# Altium PCB main.PcbDoc
Units mm, origin at the board's own origin, x right, y up, seen from the top; angles counter-clockwise.
Board outline 50.5 x 38.5 mm, 2 copper layers (Top Layer, Bottom Layer); 16 components, 10 nets, 53 pads, 14 vias.
Unrouted connection lines stored in the file: 1.
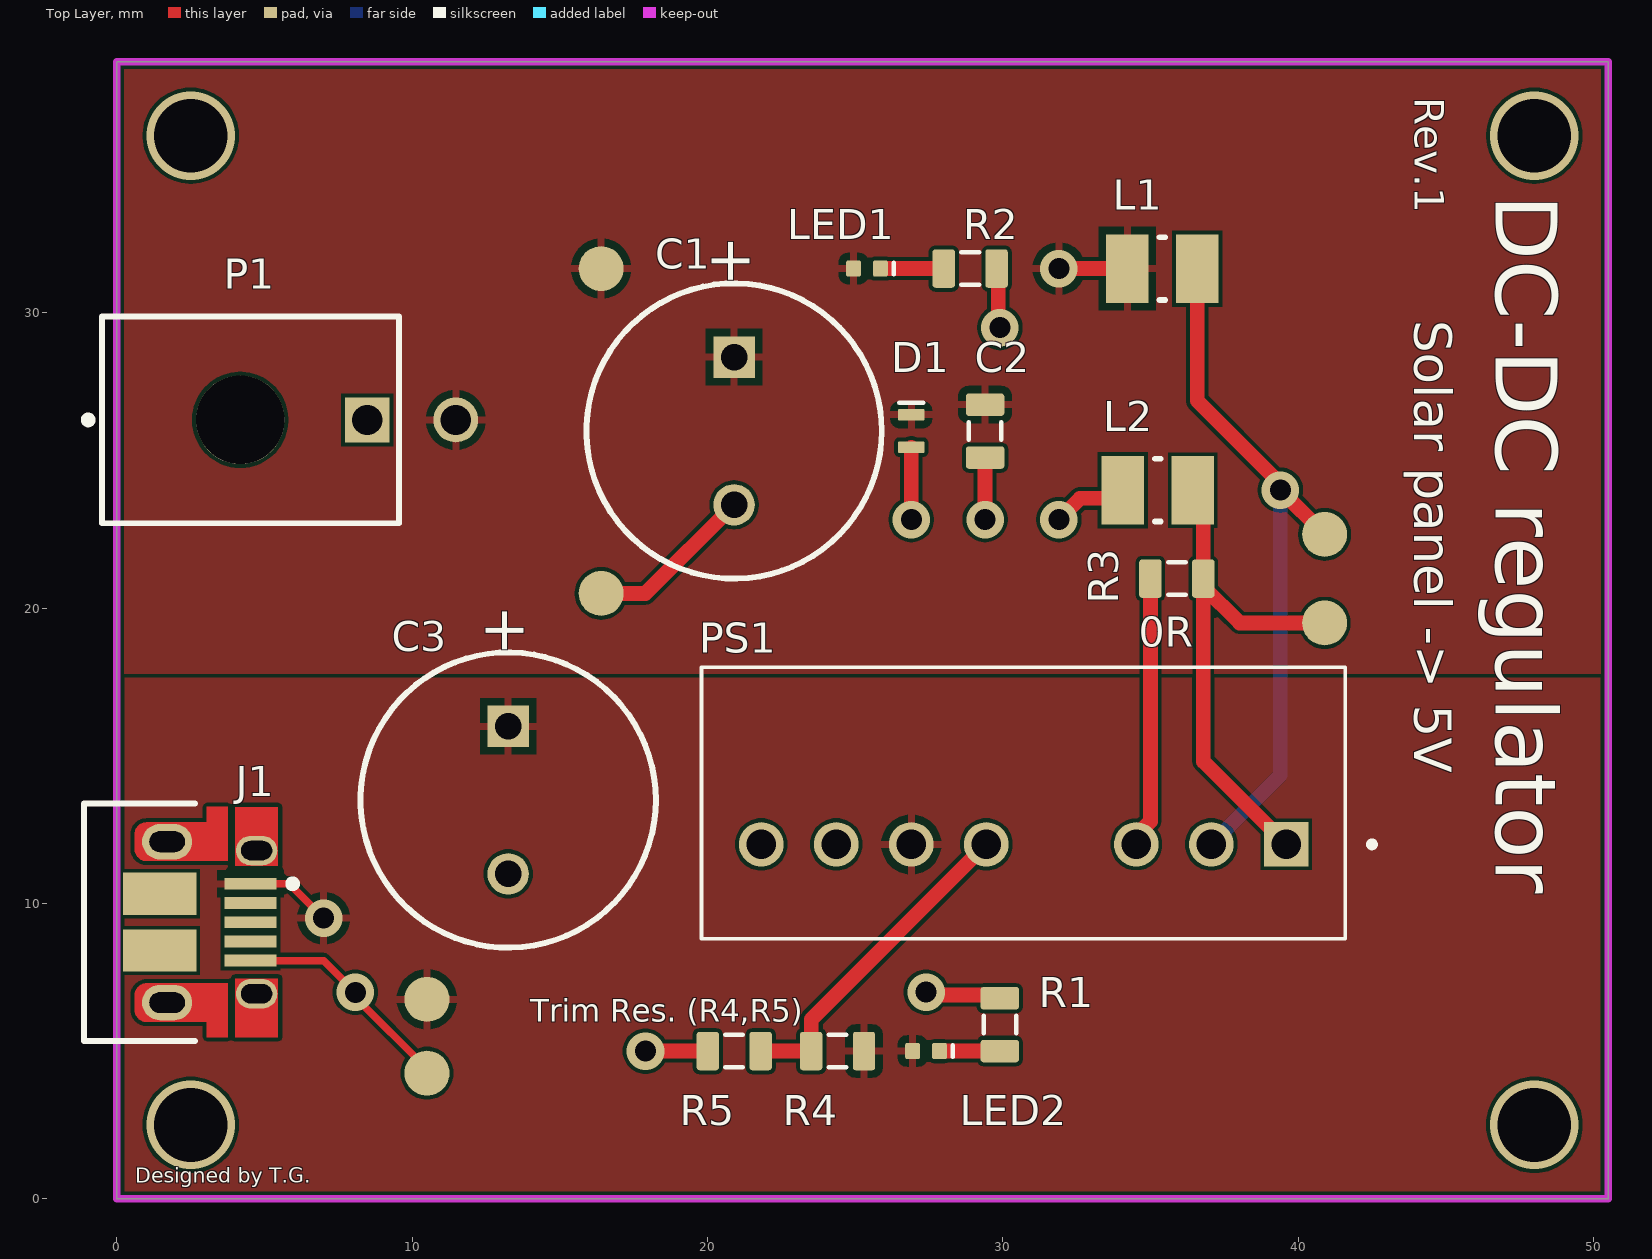
[diagram p0: Top Layer view]
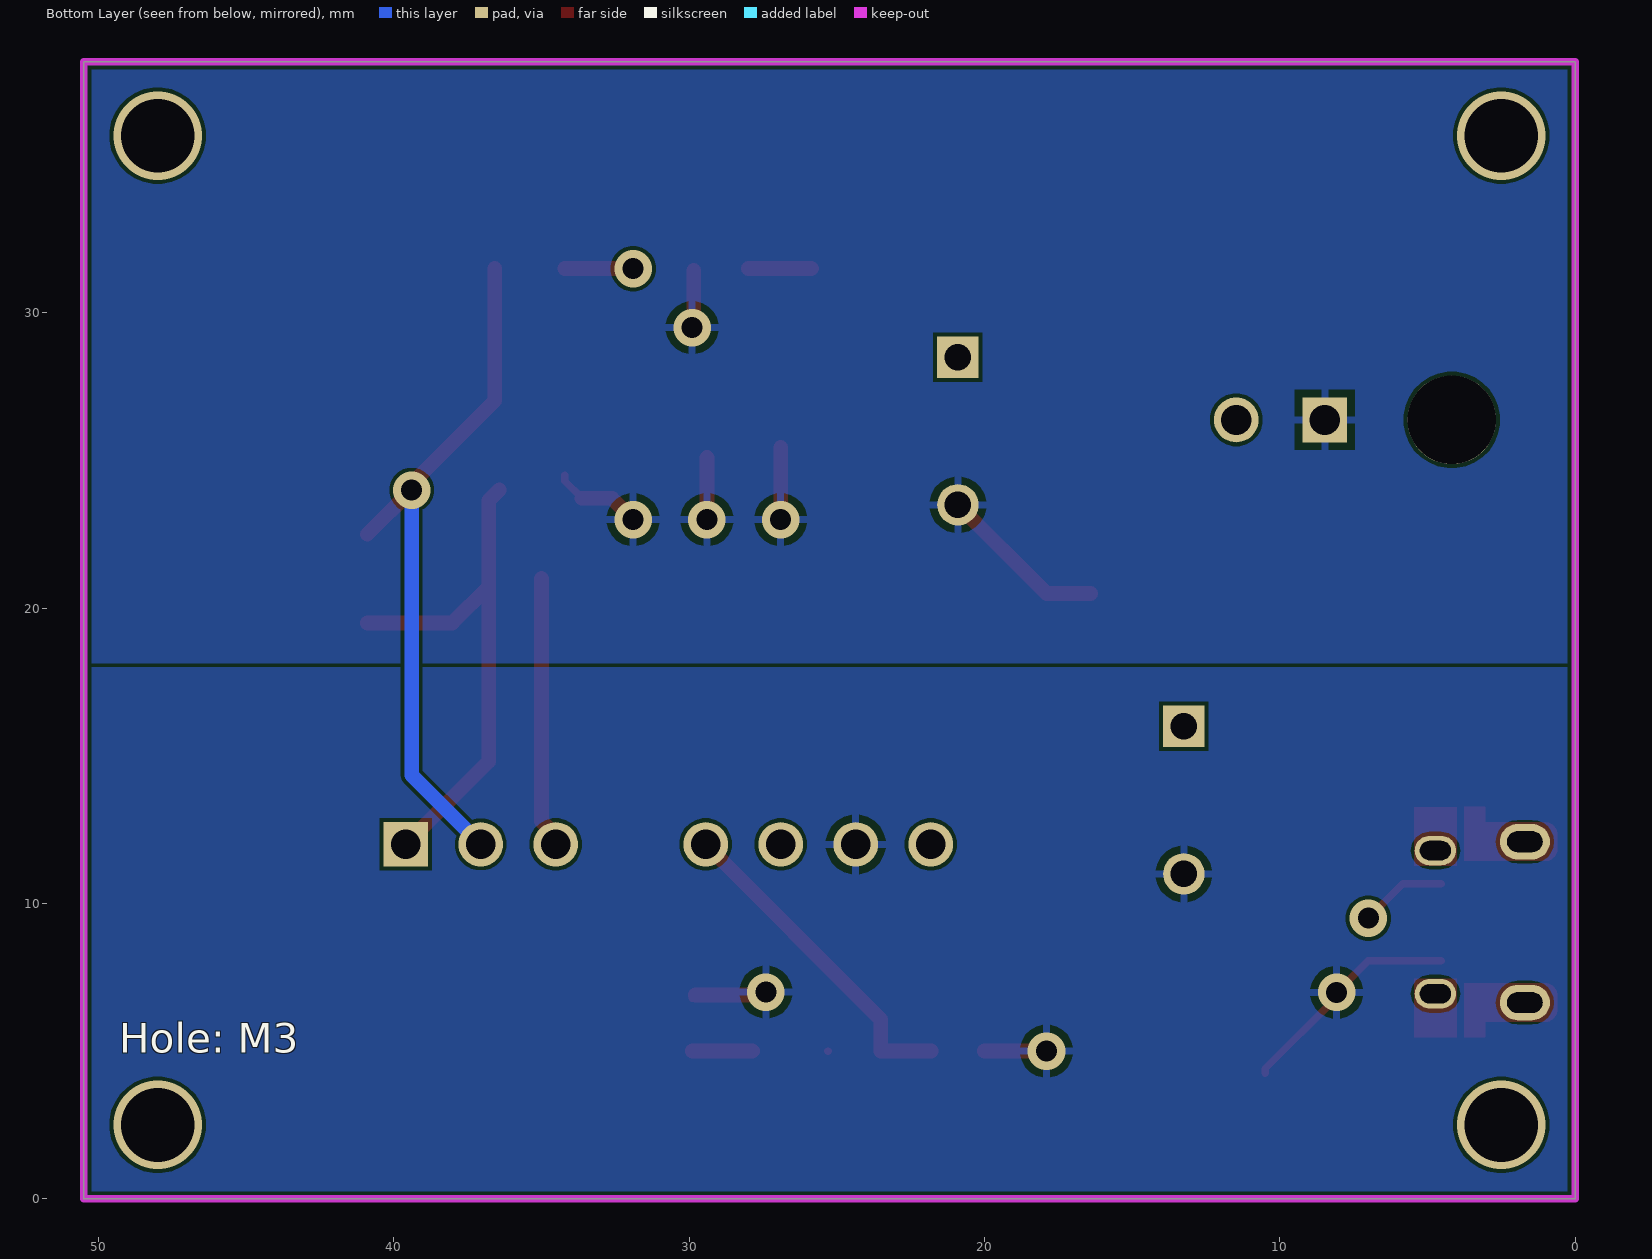
[diagram p1: Bottom Layer view, seen from below]
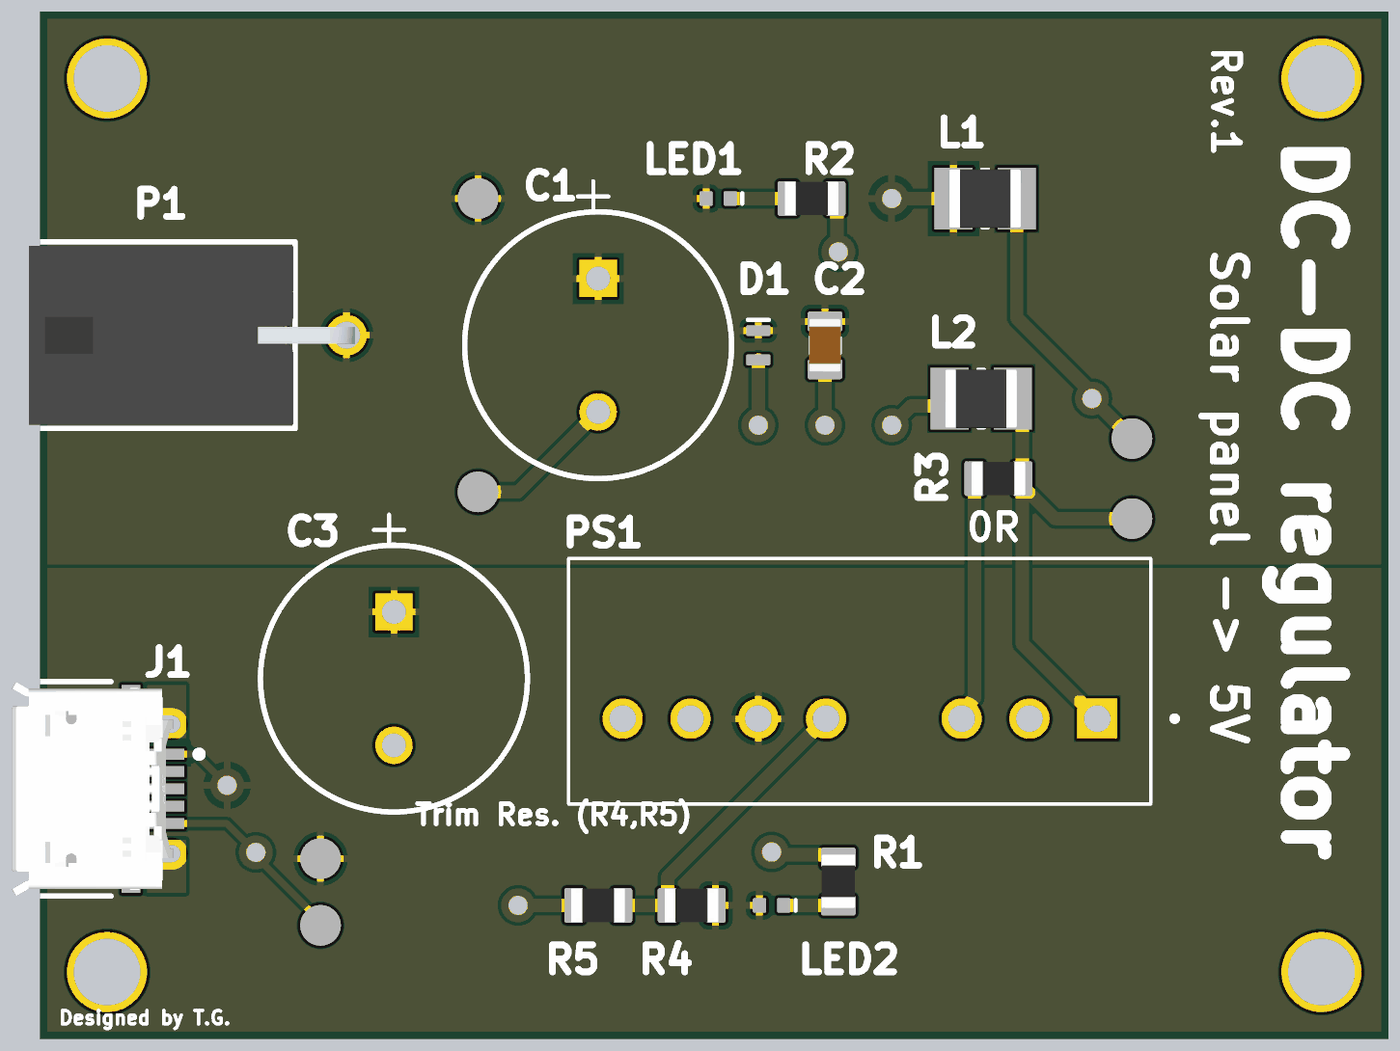
[diagram p2: 3D render of the assembled board from above, using the file's embedded part models]

## Layer stack, top to bottom
Top Solder: solder mask 0.0102, Solder Resist, Dk 3.5
Top Layer: signal copper 0.0356
Dielectric 1: dielectric 0.32, FR-4, Dk 4.8
Bottom Layer: signal copper 0.0356
Bottom Solder: solder mask 0.0102, Solder Resist, Dk 3.5

## Board outline
0,0 0,37.5 0,38.5 50.5,38.5 50.5,0 0.4,0

## Design rules (kind name [scope] priority, off if disabled: settings)
Clearance [All] p1: gap=0.127 ignorepadtopadclearanceinfootprint=FALSE
HoleSize [All] p1: absolutevalues=TRUE maxlimit=5.08 minlimit=0.025 maxpercent=80.000 minpercent=20.000
PolygonConnect [All] p1: connectstyle=Relief reliefconductorwidth=0.254 reliefentries=4 polygonreliefangle="90 Angle" airgapwidth=0.254
RoutingVias [All] p1: holewidth=0.711 width=1.27 viastyle="Through Hole" minholewidth=0.711 minwidth=1.27 maxholewidth=0.711 maxwidth=1.27
SolderMaskExpansion [All] p1: expansion=0.102 istentingtop=FALSE
Width [All] p1: maxlimit=0.5 minlimit=0.254 preferedwidth=0.254 minimp=50.000000 maximp=50.000000 favimp=50.000000
29 further rules are at their usual default settings.

## Components (designator, comment, footprint, x,y, rotation, side; value= is the part's Value field where it differs from the comment)
C1 "ECA-1HM221" CAPPR65-500-1250X1000X1350 20.9,26 r270 top value=220µF
C2 "Capacitor 22µF +/-40% 16V 0805" CAPC0805(2012)145_L 29.4,26 r90 top value=22µF
C3 "ECA-1HM221" CAPPR65-500-1250X1000X1350 13.25,13.5 r270 top value=220µF
D1 "ESDA25P35-1U1M" STM-QFN1610 26.9,26 r270 top
J1 "10103594-0001LF" FCI-10103594-0001LF_V 3.09,9.366 r270 top
L1 "LQM2HPN1R0MJ0L" INDC2520X120X60ML20T20 35.4,31.5 r0 top value=1µH
L2 "LQM2HPN1R0MJ0L" INDC2520X120X60ML20T20 35.25,24 r0 top value=1µH
LED1 "QBLP595-R" QTB-QBLP595_V 25.4,31.5 r180 top
LED2 "QBLP595-R" QTB-QBLP595_V 27.4,5 r180 top
P1 "64900211022" 66200221022 4.525,26.375 r270 top
PS1 "RS6-0505S" CONV_RS6-0505S 30.7,13.4 r180 top
R1 "1KR5J" RESC0805(2012)_L 29.9,5.9 r90 top value=1kΩ
R2 "1KR5J" RESC0805(2012)_L 28.9,31.5 r0 top value=1kΩ
R3 "0R 0805" RESC0805(2012)_L 35.9,21 r0 top value=0R
R4 "0R 0805" RESC0805(2012)_L 24.4,5 r180 top value=?R
R5 "0R 0805" RESC0805(2012)_L 20.9,5 r180 top value=?R

## Footprints (in the part's own frame and the unit in brackets; to place one, negate y for a bottom-side part, rotate by r counter-clockwise, add the part's x,y. Pads: shape width x height; smd on the part's side, far side on the other; paste and mask are expansions set on the pad)
66200221022 [mm] "Dual row Right angle header With plastic peg 02p"
  rect 1.52x1.52 hole 1.02: 1(0,3.95)
  round 1.52 hole 1.02: 2(0,6.95)
  round 3 hole 3 unplated: MH1(0,-0.35)
  silkscreen extent -3.5,-5.62 3.5,5.02, body extent -3.35,-4.95 3.35,7.27, height 8.79
CAPC0805(2012)145_L [mm] "Chip Capacitor, Body 2.0x1.2mm, Height 1.45mm, IPC High Density"
  rrect25% 0.76x1.3 smd: 1(-0.9,0) 2(0.89,0)
  silkscreen extent -0.3,-0.55 0.3,0.55, body extent -1,-0.6 1,0.6, height 1.45
CAPPR65-500-1250X1000X1350 [mm] "THD, 2-Leads, Dia 10mm, Body Length 12.5mm"
  rect 1.4x1.4 hole 0.9: 1(-2.5,0)
  round 1.4 hole 0.9: 2(2.5,0)
  silkscreen extent -5,-5 5,5, body extent -5,-5 4.95,5, height 13.5
CONV_RS6-0505S [mm]
  rect 1.508x1.508 hole 1: 1(-8.9,1.4)
  round 1.508 hole 1: 2(-6.36,1.4) 3(-3.82,1.4) 5(1.26,1.4) 6(3.8,1.4) 7(6.34,1.4) 8(8.88,1.4)
  silkscreen extent -11.9,-4.6 10.9,4.6
FCI-10103594-0001LF_V [mm] "SMD, 5-Leads, Body 8.04x5.62mm, Pitch 0.65 mm"
  rect 0.4x1.75 smd: 1(-1.3,1.435) 2(-0.65,1.435) 3(0,1.435) 4(0.65,1.435) 5(1.3,1.435)
  oval 1x1.4 hole 0.65 slot 1.05 at 90 deg: 6(-2.425,1.64) 7(2.425,1.64)
  oval 1.2x1.7 hole 0.7 slot 1.2 at 90 deg: 8(2.725,-1.39) 9(-2.725,-1.39)
  rect 1.425x2.5 smd: 10(-0.962,-1.64) 11(0.962,-1.64)
  Top Layer region: 3.9,2.37 1.9,2.37 1.9,0.91 3.9,0.91
  Top Layer region: -3.9,0.91 -1.9,0.91 -1.9,2.37 -3.9,2.37
  Top Layer region: 3.375,-0.04 3.375,-2.09 3.373,-2.129 3.369,-2.167 3.365,-2.185 3.359,-2.203 3.348,-2.239 3.329,-2.277 3.308,-2.312 3.284,-2.344 3.258,-2.374 3.227,-2.401 3.194,-2.426 3.158,-2.446 3.121,-2.464 3.08,-2.477 3.049,-2.483 3.012,-2.488 2.975,-2.49 2.475,-2.49 2.432,-2.488 2.391,-2.481 2.351,-2.471 2.312,-2.456 2.28,-2.439 2.249,-2.421 2.217,-2.396 2.19,-2.37 2.164,-2.342 2.143,-2.312 2.121,-2.277 2.105,-2.241 2.093,-2.209 2.088,-2.192 2.084,-2.175 2.08,-2.155 2.076,-2.134 2.075,-2.112 2.075,-2.09 2.075,-0.04 2.075,0.66 3.9,0.66 3.9,-0.04
  Top Layer region: -3.375,-0.04 -3.375,-2.09 -3.373,-2.129 -3.369,-2.167 -3.365,-2.185 -3.359,-2.203 -3.348,-2.239 -3.329,-2.277 -3.308,-2.312 -3.284,-2.344 -3.258,-2.374 -3.227,-2.401 -3.194,-2.426 -3.158,-2.446 -3.121,-2.464 -3.08,-2.477 -3.049,-2.483 -3.012,-2.488 -2.975,-2.49 -2.475,-2.49 -2.432,-2.488 -2.391,-2.482 -2.351,-2.471 -2.312,-2.456 -2.28,-2.439 -2.249,-2.421 -2.217,-2.397 -2.19,-2.37 -2.164,-2.342 -2.143,-2.312 -2.121,-2.277 -2.105,-2.241 -2.093,-2.209 -2.088,-2.192 -2.084,-2.175 -2.08,-2.155 -2.076,-2.134 -2.075,-2.112 -2.075,-2.09 -2.075,-0.04 -2.075,0.66 -3.9,0.66 -3.9,-0.04
  silkscreen extent -4.02,-4.21 4.02,2.99, body extent -4.02,-4.15 4.02,1.88, height 2.9
INDC2520X120X60ML20T20 [mm] "Chip Inductor, 2-Leads, Body 2.70x2.20mm, IPC Low Density"
  rect 1.43x2.32 smd: 1(-1.185,0) 2(1.185,0)
  silkscreen extent -0.1,-1.06 0.1,1.06, body extent -1.35,-1.1 1.35,1.1, height 1.2
QTB-QBLP595_V [mm] "SMD, 2-Leads, Body 1x0.5mm"
  rrect25% 0.5x0.55 smd: 1(-0.455,0) 2(0.455,0)
  silkscreen extent -0.9,-0.2 -0.9,0.2, body extent -0.5,-0.25 0.5,0.25, height 0.5
RESC0805(2012)_L [mm] "Chip Resistor, Body 2.0x1.3mm, IPC High Density"
  rrect25% 0.76x1.3 smd: 1(-0.9,0) 2(0.89,0)
  silkscreen extent -0.3,-0.55 0.3,0.55, body extent -1,-0.62 1,0.63, height 0.6
STM-QFN1610 [mm] "SMD, 2-Leads, Body 1.6x1mm"
  rrect25% 0.4x0.9 smd: 1(-0.55,0) 2(0.55,0)
  silkscreen extent -0.95,-0.4 -0.95,0.4, body extent -0.8,-0.5 0.8,0.5, height 0.6

## Part data
C1 C3: library part CMP-001-00028-5, "Aluminum Electrolytic Capacitor, 220 uF, +/- 20%, 50 V, -40 to 85 degC, 2-Pin THD, RoHS, Bulk", Capacitor Type=Electrolytic, Case/Package=Radial, Manufacturer=Panasonic, Max Operating Temperature=85°C, Min Operating Temperature=-40°C, Package Description="2-Pin Radial Lead, Dia 10 mm, Body Length 12.5 mm", Package Quantity=200, Package Reference=CAPPR65-500-1250X1000X1350, Ripple Current=400mA, Tolerance=20%, Voltage Rating=50V, Datasheet URL=http://industrial.panasonic.com/cdbs/www-data/pdf/RDF0000/DMF0000COL68.pdf, Datasheet Version=Mar-16, Diameter=10mm, Lead Pitch=5mm, Manufacturer URL=http://www.panasonic.com/, Mounting Technology=TH, Packaging=Bulk, Pins=2, Ripple Current (AC)=400mA, RoHS Compliant=True
C2: library part CMP-001-00081-2, "Chip Capacitor, 22µF +/-40%, 16V, 0805, Thickness 1.45 mm", Case/Package=0402, Max Operating Temperature=85°C, Min Operating Temperature=-55°C, Tolerance=5%, Voltage Rating=16V, Mounting Technology=SMT, Pins=2
D1: library part CMP-004-00023-2, "TVS DIODE 22V 41V 1610", Case/Package="QFN1610 (0603)", Max Surge Current=35A, Peak Inverse Voltage=23.3V, Mounting Technology=SMT, Pins=2, RoHS Compliant=Yes
J1: library part CMP-002-00038-1, "Micro USB 2.0 B Receptacle, 5 Position, Height 3.24 mm, -55 to 85 degC, RoHS, Tape and Reel", Case/Package=FCI-10103594-0001LF, Current Rating=1.8A, Manufacturer="FCI Electronics", Max Operating Temperature=85°C, Min Operating Temperature=-55°C, Package Description="5-Pin Surface Mount Device, Body 8.04 x 5.62 mm", Package Quantity=1500, Voltage Rating=100V, Connector Type=USB, Contact Material=Copper, Contact Plating=Gold, Datasheet URL=http://portal.fciconnect.com/Comergent//fci/drawing/10103594.pdf, Datasheet Version="Rev. A, 06/2010", Gender=Female, Lead Pitch=0.65mm, Manufacturer URL=http://portal.fciconnect.com/, Mounting Technology=SM, Package Reference=FCI-10103594-0001LF, Packaging=TapeandReel, Pins=5, RoHS Compliant=True
L1 L2: library part CMP-006-00008-4, "Chip Inductor, 1 uH, +/- 20%, 1 MHz, -55 to 125 degC, 1008 (2520 Metric), RoHS, Tape and Reel", Case/Package=1008, Current Rating=1.5A, Manufacturer=Murata, Max Operating Temperature=85°C, Min Operating Temperature=-40°C, Package Description="2-Pin Surface Mount Device, Body 2.5 x 2 mm", Package Quantity=3000, Resistance=0.09Ohm, Self Resonant Frequency=70MHz, Tolerance=20%, Core Material=Ferrite, Datasheet URL=http://psearch.en.murata.com/inductor/product/LQM2HPN1R0MJ0%23.pdf, Datasheet Version=Aug-16, Mounting Technology=SM, Package Reference=1008, Packaging=TapeandReel, RoHS Compliant=True, Shielding=Shielded
LED1 LED2: library part CMP-007-00040-2, "Chip LED 0402, Red, 0.02 A, 2.0 to 2.5 V, -40 to 80 degC, 2-Pin SMD, RoHS, Tape and Reel", Case/Package=0402, Colour=Red, Mounting Technology=SMT, Pins=2, RoHS Compliant=Yes
P1: library part 66200221022, "THT Male Header WR-MPC3, with Snap-in Plastic Pegs, Right Angled, Dual Row, pitch 3 mm, 2 pins", Contact Resistance="10 mOhm", Operating Temperature="-40 to 105 degC", Working Voltage="250 VAC", ComponentLink1Description=Manufacturer, ComponentLink1URL=http://www.we-online.de, ComponentLink2Description=Datasheet, ComponentLink2URL=https://katalog.we-online.de/em/datasheet/6620xx21022.pdf, Gender=Male, Mounting Technology=THT, Orientation="Right Angled", Packaging=Tube, Part Number=66200221022, Pin Number=2, Pitch="3 mm", Published Date="September 2018", Publisher="Wurth Elektronik"
PS1: "6 Watt SIP8 Single and Dual Output", Package=None, Availability=Unavailable, MP=RS6-0505S, Price=None
R1 R2: library part CMP-009-00076-1, "1K 0.125W 5% 0805 (2012 Metric)  SMD", Case/Package=0805, Power=0.125W, Tolerance=5%, Mounting Technology=SMT, Pins=2
R3 R4 R5: library part CMP-009-00076-1, "0R 0805 (2012 Metric)  SMD", Case/Package=0805, Power=0.125W, Tolerance=5%, Mounting Technology=SMT, Pins=2

## Free pads (board coordinates)
  round 1.524 smd: 3(10.5,4.25) 3(10.5,6.75) 3(16.4,20.5) 3(16.4,31.5) 3(40.9,19.5) 3(40.9,22.5)

## Via types
v1: diameter 1.27, hole 0.711, Top Layer to Bottom Layer, tented both sides, 10 vias
v2: diameter 3, hole 2.5, Top Layer to Bottom Layer, 4 vias

## Nets (pads, with @x,y where several pads share a name; then routed paths per layer and width w, separated by ;. In a path a pad name is that pad's centre, name@x,y a point inside that pad or via, vN(x,y) a via of type N, cw(c..) or ccw(c..) an arc to the next point about the centre after c; other vN are vias at no path point)
+Vin: L1.2 pad.3@40.9,22.5 PS1.2 | length 23.8
  Top Layer w0.254: v1(39.4,24) v1@39.4,24.213
  Top Layer w0.5: L1.2 36.585,27.028 v1@39.4,24.213 ; v1(39.4,24) pad.3@40.9,22.5
  Bottom Layer w0.5: PS1.2 39.4,14.34 v1(39.4,24)
+Vout: C3.1 J1.1 LED2.2 pad.3@10.5,6.75 PS1.6 R4.1 | length 3
  Top Layer w0.254: J1.1 5.834,10.666 v1(7,9.5) ; R4.1@25.296,4.996 R4.1
-Vin: L2.2 pad.3@40.9,19.5 PS1.1 R3.2 | length 17.9
  Top Layer w0.5: L2.2 36.79,23.645 R3.2@36.79,20.73 ; PS1.1 36.79,14.81 R3.2@36.79,20.73 ; pad.3@40.9,19.5 38.02,19.5 R3.2@36.79,20.73
-Vout: C3.2 J1.5 pad.3@10.5,4.25 PS1.7 R1.2 R5.2 | length 12.4
  Top Layer w0.254: J1.5 6.996,8.066 v1(8.077,6.985) 8.077,6.829 10.5,4.406 pad.3@10.5,4.25 ; v1(27.4,7) v1@27.505,6.895 ; R1.2@29.795,6.895 R1.2
  Top Layer w0.5: v1(17.9,5) R5.2 ; v1@27.505,6.895 R1.2@29.795,6.895
NetC1_1: C1.1 C2.2 D1.1 L1.1 LED1.2 P1.2 pad.3@16.4,31.5 | length 2.3
  Top Layer w0.5: v1(31.9,31.5) L1.1
NetC1_2: C1.2 C2.1 D1.2 L2.1 P1.1 pad.3@16.4,20.5 R2.2 | length 15.4
  Top Layer w0.254: C2.1 C2.1@29.405,25.105 ; R2.2 R2.2@29.845,31.445 ; v1@29.845,29.555 v1(29.9,29.5) ; L2.1@33.627,23.718 34.215,24.306 L2.1@34.215,24.5
  Top Layer w0.5: pad.3@16.4,20.5 17.9,20.5 C1.2 ; v1(26.9,23) D1.2 ; v1(29.4,23) C2.1 ; v1@29.845,29.555 R2.2@29.845,31.445 ; v1(31.9,23) 32.618,23.718 L2.1@33.627,23.718
NetLED1_1: LED1.1 R2.1 | length 2.1
  Top Layer w0.5: LED1.1 R2.1
NetLED2_1: LED2.1 R1.1 | length 2
  Top Layer w0.5: LED2.1 R1.1
NetPS1_3: PS1.3 R3.1 | length 9.2
  Top Layer w0.5: PS1.3 34.52,12.296 35,12.776 R3.1
NetPS1_5: PS1.5 R4.2 R5.1 | length 11.2
  Top Layer w0.5: R5.1 R4.2 23.51,6.07 PS1.5
pads on no net: J1.2 J1.3 J1.4 J1.6 J1.7 J1.8 J1.9 J1.10 J1.11 P1.MH1 PS1.8
copper on no net:
  other v2: 2.5,2.5 48,2.5 2.5,36 48,36

## Polygon pours and split planes (outlines as drawn)
+Vout on Top Layer "+VOUT_L01_P006" (solid, remove dead copper, pour order 6): -2.54,18 -1.22,-1.22 52.12,-1.22 52.12,18
NetC1_1 on Top Layer "NETC1_1_L01_P004" (solid, remove dead copper, pour order 4): -1.27,40.64 -1.27,17.78 52.07,17.78 52.07,40.64
NetC1_2 on Bottom Layer "NETC1_2_L02_P011" (solid, remove dead copper, pour order 11): -6.35,40.64 -6.35,17.78 64.77,17.78 66.04,19.05 66.04,44.45
-Vout on Bottom Layer "-VOUT_L02_P007" (solid, remove dead copper, pour order 7): -1.5,18 -1.5,-1.25 52.5,-1.25 52.5,18

## Keep-outs
Keep-Out Layer:
  lines w0.254: 0,0 0,37.5 0,38.5 0.4,38.5 50.5,38.5 50.5,0 0.4,0 0,0

## Silkscreen, mask and mechanical layers (free items; w line width, h text height)
Top Overlay:
  text "Rev.1" at 43.95,37.3 h1 r270
  text "DC-DC regulator" at 46.7,34 h2.1 r270
  text "Solar panel -> 5V" at 43.927,29.746 h1.27 r270
  text "0R" at 34.6,18.7 h1.02
  text "Trim Res. (R4,R5)" at 14,6 h0.76
  text "Designed by T.G." at 0.627,0.546 h0.51
Bottom Overlay:
  text "Hole: M3" at 49.3,4.95 h1
Mechanical 1:
  lines w0.254: 0,0 0,38.5 50.5,38.5 50.5,0 50.165,0 49.911,0 0,0

## Text inside footprints (layer, text, board x,y; h text height)
C1: Top Overlay "+" at 20.138,32.604 h1.5 r270
C3: Top Overlay "+" at 12.488,20.104 h1.5 r270